# Altium PCB Control_Board_Model_C_Basic_Component_Placement.PcbDoc (part 5 of 8)
Units mil, origin at the board's own origin, x right, y up, seen from the top; angles counter-clockwise.
Board outline 3417.32 x 2110.24 mil, 6 copper layers (1-SIG-TOP, 2-GND, 3-PWR, 4-SIG-HOR, 5-SIG-VERT, 6-GND-BOT), stack 46.063 mil thick; 420 components, 340 nets, 1596 pads, 39 vias.
Unrouted connection lines stored in the file: 362.
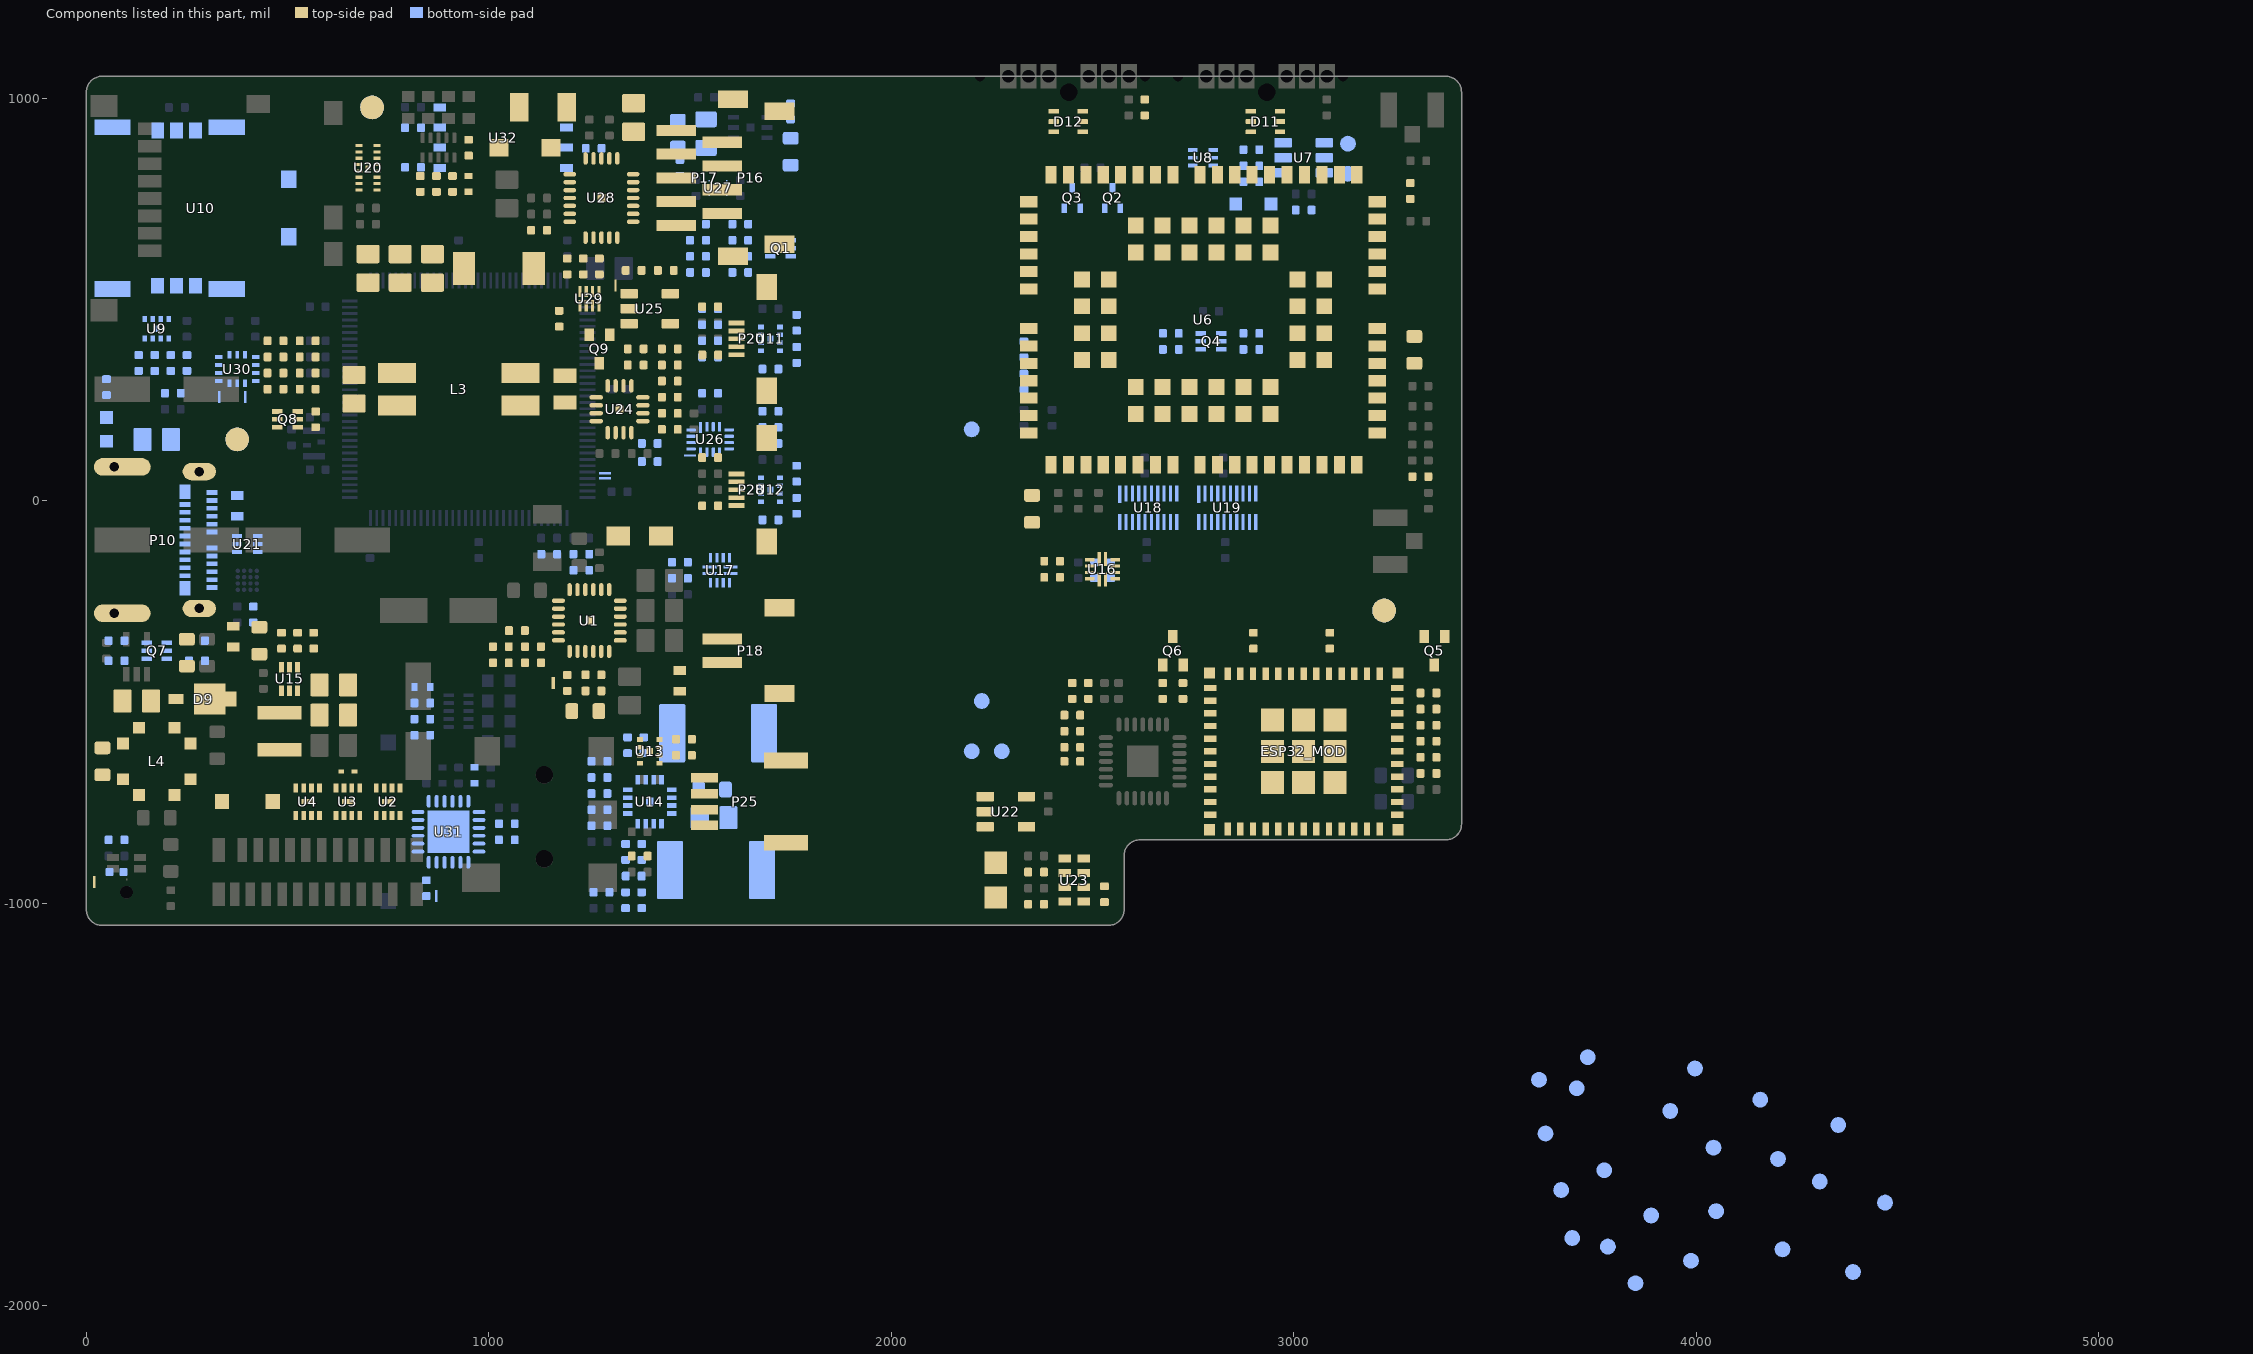
[diagram p7: the components of this part, seen from the top]

## Part data (continued)
L2: "1µH Semi-Shielded Wirewound Inductor 2.4A 54mOhm Max Nonstandard", Inductance="1 uH", Manufacturer="Wurth Elektronik", Manufacturer Part Number=74405031010, Maximum DC Current="2.4 A", Maximum DC Resistance="54 mOhms", Maximum Operating Temperature="+ 125 C", Minimum Operating Temperature="- 40 C", Package / Case="3 mm x 3 mm", Saturation Current="5.4 A", Self Resonant Frequency="66 MHz", Supplier Part Number 1=710-74405031010, Test Frequency="1 MHz", Tolerance="20 %", Application=Power, Brand="Wurth Elektronik", Category="Fixed Inductors", ComponentLink1Description=https://www.mouser.com/datasheet/2/445/74405031010-1720907.pdf, ComponentLink1URL=https://www.mouser.com/datasheet/2/445/74405031010-1720907.pdf, Height="1.2 mm", Length="3 mm", Minimum Order Quantity=1, Mount="Surface Mount", Mounting Style="PCB Mount", Packaging="Cut Tape", Pricing 1="1=0.730, 10=0.721, 50=0.601, 100=0.457, 1000=0.397, 2000=0.385 (USD)", Product="Fixed Inductors", Product Type="Fixed Inductors", Reeling=True, RoHS="RoHS Compliant", RoHS - Mouser=Y, Series=WE-LQSH, Shielding=Shielded, Standard Pack Qty=2000, Stock 1=2000, Subcategory="Inductors, Chokes & Coils", Supplier 1=Mouser, Supplier 2=Digi-Key, Supplier Part Number 2=732-10780-1-ND, Termination=-, Termination Style=SMD/SMT, Width="3 mm"
L3: "2.2µH Shielded Coupled Inductors 3.2A 22mOhm Max 4040 (10.3x10.3 Metric)", Inductance="2.2 uH", Manufacturer=Coilcraft, Manufacturer Part Number=MSD1048H-222, Maximum DC Current="3.2 A", Maximum DC Resistance="22 mOhms", Maximum Operating Temperature="+ 125 C", Minimum Operating Temperature="- 40 C", Self Resonant Frequency="55 MHz", Test Frequency="100 kHz", Tolerance="30 %", Application=Power, Brand=Coilcraft, Category="Fixed Coupled Inductors", ComponentLink1Description=https://www.coilcraft.com/en-us/products/power/coupled-inductors/1-1-shielded-coupled/msd_h/msd1048h/#, ComponentLink1URL=https://www.coilcraft.com/getmedia/492eebb2-11bb-49ba-b07b-44c830c73f93/msd1048h.pdf, Height="4.8 mm", Length="10.3 mm", Minimum Order Quantity=1, Mount="Surface Mount", Mounting Style="PCB Mount", Packaging="Cut Tape", Product="Power Inductors", Product Type="Fixed Coupled Inductors", Reeling=True, Series=MSD1048H, Shielding=Shielded, Subcategory="Inductors, Chokes & Coils", Termination=-, Termination Style=SMD/SMT, Type="SMD Inductor", Width="10.3 mm"
L4: "6.8µH Shielded Coupled Inductors 1.2A 160mOhm Max 1919 (4.8x4.8 Metric)", Inductance="6.8 uH", Manufacturer=Coilcraft, Manufacturer Part Number=LPD5030-682MR, Maximum DC Current="1.2 A", Maximum DC Resistance="160 mOhms", Maximum Operating Temperature="+ 125 C", Minimum Operating Temperature="- 40 C", Self Resonant Frequency="40 MHz", Test Frequency="100 kHz", Tolerance="30 %", Application=Power, Brand=Coilcraft, Category="Fixed Coupled Inductors", ComponentLink1Description=https://www.coilcraft.com/en-us/products/power/coupled-inductors/1-1-shielded-coupled/msd_h/msd1048h/#, ComponentLink1URL=https://www.coilcraft.com/getmedia/492eebb2-11bb-49ba-b07b-44c830c73f93/msd1048h.pdf, Height="2.9 mm", Length="4.8 mm", Minimum Order Quantity=1, Mount="Surface Mount", Mounting Style="PCB Mount", Packaging="Cut Tape", Product="Power Inductors", Product Type="Fixed Coupled Inductors", Reeling=True, Series=LPD5030, Shielding=Shielded, Subcategory="Inductors, Chokes & Coils", Termination=-, Termination Style=SMD/SMT, Type="SMD Inductor", Width="4.8 mm"
P10: library part "CONN 2012670005 RCP USB3.1 TYPEC 24P SMD RA", "USB-C (USB TYPE-C) USB 3.2 Gen 2 (USB 3.1 Gen 2, Superspeed + (USB 3.1)) Receptacle Connector 24 Position Surface Mount, Right Angle; Through Hole", Current Rating=5A, Flammability Rating="UL94 V-0", Insulation Color=Black, Manufacturer=Molex, Manufacturer Part Number=201267-0005, Max Operating Temperature=105°C, Min Operating Temperature=-40°C, Supplier Part Number 1=WM17992CT-ND, Voltage Rating=30V, ComponentLink1Description=https://www.molex.com/pdm_docs/sd/2012670005_sd.pdf?src-supplier=Digi-Key, ComponentLink1URL=https://www.molex.com/pdm_docs/sd/2012670005_sd.pdf?src-supplier=Digi-Key, ComponentLink2Description=http://www.farnell.com/datasheets/2722545.pdf?src-supplier=Element14, ComponentLink2URL=http://www.farnell.com/datasheets/2722545.pdf?src-supplier=Element14, ComponentLink3Description=http://www.farnell.com/datasheets/2722545.pdf?src-supplier=Newark, ComponentLink3URL=http://www.farnell.com/datasheets/2722545.pdf?src-supplier=Newark, ComponentLink4Description=https://www.molex.com/pdm_docs/pk/2012670005-PK1.pdf?src-supplier=Digi-Key, ComponentLink4URL=https://www.molex.com/pdm_docs/pk/2012670005-PK1.pdf?src-supplier=Digi-Key, ComponentLink5Description=http://www.farnell.com/datasheets/2722545.pdf?src-supplier=Farnell, ComponentLink5URL=http://www.farnell.com/datasheets/2722545.pdf?src-supplier=Farnell, Connector Type=USB, Contact Plating=Gold, Gender=Receptacle, Mating Cycles=20000, Mount="Surface Mount,Through Hole", Number of Contacts=24, Number of Ports=1, Packaging="Tape and Reel", Pricing 1="1=2.34, 10=1.997, 100=1.6496 (USD)", Shielding=Shielded, Stock 1=2580, Supplier 1=Digi-Key, Termination=Solder
P16: library part "CONN HEADER SMD R/A 4POS 1.5MM", "Connector Header Surface Mount, Right Angle 4 position 0.059\" (1.50mm)", Color=Natural, Contact Resistance=30mR, Current Rating=1A, Housing Color=Beige, Manufacturer=JST, Manufacturer Part Number=S4B-ZR-SM4A-TF(LF)(SN), Max Operating Temperature=85°C, Max Voltage Rating (AC)=50V, Min Operating Temperature=-25°C, Supplier Part Number 1=455-1695-1-ND, ComponentLink1Description=http://www.jst-mfg.com/product/pdf/eng/eZH.pdf?src-supplier=Digi-Key, ComponentLink1URL=http://www.jst-mfg.com/product/pdf/eng/eZH.pdf?src-supplier=Digi-Key, ComponentLink2Description=http://uk.rs-online.com/webdocs/13ed/0900766b813ed0da.pdf?src-supplier=RSComponents, ComponentLink2URL=http://uk.rs-online.com/webdocs/13ed/0900766b813ed0da.pdf?src-supplier=RSComponents, ComponentLink3Description=https://www.verical.com/server-webapp/html/getDatasheet?partID=646289&src-supplier=Verical, ComponentLink3URL=https://www.verical.com/server-webapp/html/getDatasheet?partID=646289&src-supplier=Verical, ComponentLink4Description=https://www.verical.com/server-webapp/html/getDatasheet?partID=558977&src-supplier=Verical, ComponentLink4URL=https://www.verical.com/server-webapp/html/getDatasheet?partID=558977&src-supplier=Verical, Connector Type="Male Pin", Contact Material=Brass,Tin, Contact Plating=Tin,Copper, Contact Type="Male Pin", Depth=6.5mm, Fastening Type=Detent, Gender=Male, Height=7.2mm, Housing Material=Polyamide, Lead Free="Lead Free", Length=9mm, Max Current Rating=1A, Max Voltage Rating (DC)=50V, Mount="Surface Mount", Number of Contacts=4, Number of Positions=4, Number of Rows=1, Orientation="Right Angle", Packaging="Tape and Reel", pin_1=GND, pin_2=+VDC, pin_3=SENSE, pin_4=CTRL, pin_MP1=MP, pin_MP2=MP, Pitch=1.5mm, Series=ZH, Stock 1=0, Supplier 1=Digi-Key, Termination=Solder, Voltage Rating=50V, Width=3.5mm
P17: library part "CONN HEADER SMD R/A 5POS 1.5MM", "Connector Header Surface Mount, Right Angle 5 position 0.059\" (1.50mm)", Color=Natural, Contact Resistance=30mR, Current Rating=1A, Housing Color=Beige, Manufacturer=JST, Manufacturer Part Number=S5B-ZR-SM4A-TF(LF)(SN), Max Operating Temperature=85°C, Max Voltage Rating (AC)=50V, Min Operating Temperature=-25°C, Supplier Part Number 1=455-1696-1-ND, ComponentLink1Description=http://www.farnell.com/datasheets/2322661.pdf?src-supplier=Element14, ComponentLink1URL=http://www.farnell.com/datasheets/2322661.pdf?src-supplier=Element14, ComponentLink2Description=http://www.jst-mfg.com/product/pdf/eng/eZH.pdf?src-supplier=Digi-Key, ComponentLink2URL=http://www.jst-mfg.com/product/pdf/eng/eZH.pdf?src-supplier=Digi-Key, ComponentLink3Description=https://www.verical.com/server-webapp/html/getDatasheet?partID=640788&src-supplier=Verical, ComponentLink3URL=https://www.verical.com/server-webapp/html/getDatasheet?partID=640788&src-supplier=Verical, ComponentLink4Description=http://www.jst-mfg.com/product/pdf/eng/eZR.pdf?src-supplier=Future+Electronics, ComponentLink4URL=http://www.jst-mfg.com/product/pdf/eng/eZR.pdf?src-supplier=Future+Electronics, Connector Type="Male Pin", Contact Material=Brass,Tin, Contact Plating=Tin,Copper, Contact Type="Male Pin", Depth=6.5mm, Fastening Type=Detent, Gender=Male, Height=7.2mm, Housing Material=Polyamide, Lead Free="Lead Free", Length=10.5mm, Max Current Rating=1A, Mount="Surface Mount", Number of Contacts=5, Number of Positions=5, Number of Rows=1, Orientation="Right Angle", Packaging="Tape and Reel", pin_1=U, pin_2=V, pin_3=W, pin_4=NTC+, pin_5=NTC-, pin_MP1=MP, pin_MP2=MP, Pitch=1.5mm, REACH SVHC=Unknown, Series=ZH, Stock 1=0, Supplier 1=Digi-Key, Termination=Solder, Voltage Rating=50V, Width=3.5mm
P18: library part "CONN HEADER SMD R/A 2POS 1.5MM", "Connector Header Surface Mount, Right Angle 2 position 0.059\" (1.50mm)", Color=Natural, Contact Resistance=30mR, Current Rating=1A, Flammability Rating="UL94 V-0", Housing Color=Beige, Manufacturer=JST, Manufacturer Part Number=S2B-ZR-SM4A-TF(LF)(SN), Max Operating Temperature=85°C, Max Voltage Rating (AC)=50V, Min Operating Temperature=-25°C, Supplier Part Number 1=455-1693-1-ND, ComponentLink1Description=http://www.jst-mfg.com/product/pdf/eng/eZH.pdf?src-supplier=Digi-Key, ComponentLink1URL=http://www.jst-mfg.com/product/pdf/eng/eZH.pdf?src-supplier=Digi-Key, ComponentLink2Description=https://www.verical.com/server-webapp/html/getDatasheet?partID=640459&src-supplier=Verical, ComponentLink2URL=https://www.verical.com/server-webapp/html/getDatasheet?partID=640459&src-supplier=Verical, ComponentLink3Description=https://www.verical.com/server-webapp/html/getDatasheet?partID=411993&src-supplier=Verical, ComponentLink3URL=https://www.verical.com/server-webapp/html/getDatasheet?partID=411993&src-supplier=Verical, Connector Type=Header, Contact Finish - Mating=TIN, Contact Material=Brass,Tin, Contact Plating=Tin,Copper, Contact Shape=Circular, Contact Type="Male Pin", Depth=6.5mm, Fastening Type=Detent, Gender=Male, Height=7.2mm, Housing Material=Polyamide, Insulation Color=Natural, Insulation Material=Nylon, Lead Free="Lead Free", Length=6mm, Max Current Rating=1A, Max Voltage Rating (DC)=50V, Mount="Surface Mount", Number of Contacts=2, Number of Positions=2, Number of Rows=1, Orientation="Right Angle", Packaging="Tape and Reel", pin_1=BATT+, pin_2=BATT-, pin_MP1=MP, pin_MP2=MP, Pitch=1.5mm, Pricing 1="1=0.51, 10=0.481, 100=0.3688, 500=0.3207 (USD)", Series=ZH, Stock 1=136465, Supplier 1=Digi-Key, Termination=Solder, Voltage Rating=50V, Width=3.5mm
P19: "NTC Thermistor 10k 0603 (1608 Metric)", Case/Package=0603, Case Code (Metric)=1608, Manufacturer=Panasonic, Manufacturer Part Number=ERT-J1VG103JA, Max Operating Temperature=125°C, Max Power Dissipation=100mW, Min Operating Temperature=-40°C, Package Quantity=4000, Resistance=10kR, Supplier Part Number 1=P12014CT-ND, Tolerance=5%, Accuracy=1%, Case Code (Imperial)=0603, ComponentLink1Description=http://www.farnell.com/datasheets/2085569.pdf?src-supplier=Farnell, ComponentLink1URL=http://www.farnell.com/datasheets/2085569.pdf?src-supplier=Farnell, ComponentLink2Description=http://www.farnell.com/datasheets/1314428.pdf?src-supplier=Element14, ComponentLink2URL=http://www.farnell.com/datasheets/1314428.pdf?src-supplier=Element14, ComponentLink3Description=https://industrial.panasonic.com/cdbs/www-data/pdf/AUA0000/AUA0000COL16.pdf?src-supplier=Digi-Key, ComponentLink3URL=https://industrial.panasonic.com/cdbs/www-data/pdf/AUA0000/AUA0000COL16.pdf?src-supplier=Digi-Key, ComponentLink4Description=http://industrial.panasonic.com/www-data/pdf/AUA0000/AUA0000CE1.pdf?src-supplier=Future+Electronics, ComponentLink4URL=http://industrial.panasonic.com/www-data/pdf/AUA0000/AUA0000CE1.pdf?src-supplier=Future+Electronics, ComponentLink5Description=https://industrial.panasonic.com/www-data/pdf/AUA0000/AUA0000CE1.pdf?src-supplier=Avnet, ComponentLink5URL=https://industrial.panasonic.com/www-data/pdf/AUA0000/AUA0000CE1.pdf?src-supplier=Avnet, Depth=0.8mm, Lead Free="Lead Free", Length=1.6mm, Mount="Surface Mount", Number of Pins=2, Packaging="Tape and Reel", Pricing 1="1=0.15, 5=0.146, 10=0.13, 25=0.12, 50=0.096, 100=0.0824, 500=0.0721, 1000=0.0618 (USD)", Radiation Hardening=No, REACH SVHC="No SVHC", Stock 1=28072, Supplier 1=Digi-Key, Termination=SMD/SMT, Width=800um
P20 P28: library part "CONN FFC FPC TOP 5POS 0.50MM R/A", "5 Position FFC, FPC Connector Contacts, Top 0.020\" (0.50mm) Surface Mount, Right Angle", Contact Resistance=40mR, Current Rating=500mA, Flammability Rating="UL94 V-0", Manufacturer=Molex, Manufacturer Part Number=0545500571, Max Operating Temperature=85°C, Min Operating Temperature=-20°C, Package Quantity=1, Supplier Part Number 1=WM8824CT-ND, Voltage Rating=50V, Actuator Material=Polyphenylene, ComponentLink1Description=http://www.molex.com/webdocs/datasheets/pdf/en-us/0545500571_FFC_FPC_CONNECTORS.pdf?src-supplier=Avnet, ComponentLink1URL=http://www.molex.com/webdocs/datasheets/pdf/en-us/0545500571_FFC_FPC_CONNECTORS.pdf?src-supplier=Avnet, Contact Material=Bronze, Contact Plating=Gold, Depth=5mm, Housing Material=Polymer, Length=7.7mm, Mount="Surface Mount", Number of Positions=5, Number of Rows=1, Orientation="Right Angle", Packaging="Tape and Reel", pin_1=SCL, pin_2=SDA, pin_3=VDD, pin_4=GPIO, pin_5=GND, pin_MP1=MP, pin_MP2=MP, Pitch=0.02inch, Pricing 1="1=0.98, 10=0.808, 100=0.673, 1000=0.5384 (USD)", Radiation Hardening=No, Stock 1=20865, Supplier 1=Digi-Key, Termination=Solder, Wire/Cable Type=Straight
P25: library part "CONN HEADER SMD R/A 4POS 1MM", "Connector Header Surface Mount, Right Angle 4 position 0.039\" (1.00mm)", Color=Natural, Manufacturer=JST, Manufacturer Part Number=SM04B-NSHSS-TB(LF)(SN), Supplier Part Number 1=455-2774-1-ND, Connector Type="Outer Shroud Contact", Contact Plating=Tin, Contact Type="Outer Shroud Contact", Fastening Type=Latch, Mount="Surface Mount", Number of Positions=4, Number of Rows=1, Packaging="Tape and Reel", pin_1=B+, pin_2=B-, pin_3=A-, pin_4=A+, pin_MP1=MP, pin_MP2=MP, Pitch=0.039inch, Pricing 1="1=0.79, 10=0.694, 100=0.5985, 500=0.4897 (USD)", Series=NSH, Stock 1=27326, Supplier 1=Digi-Key, Termination=Solder
Q1 Q4 Q7: library part "ARRAY MOSFET 2N-CH 30V 0.4A SOT-563", "Mosfet Array 2 N-Channel (Dual) 30V 400mA 400mW Surface Mount SOT-563", Case/Package=SOT-563, Continuous Drain Current (ID)=400mA, Drain to Source Breakdown Voltage=30V, Drain to Source Resistance=1.2R, Gate to Source Voltage (Vgs)=10V, Input Capacitance=39pF, Manufacturer=Diodes, Max Operating Temperature=150°C, Max Power Dissipation=400mW, Min Operating Temperature=-55°C, Package Quantity=3000, Supplier Part Number 1=DMN32D2LV-7DICT-ND, ComponentLink1Description=https://www.diodes.com/assets/Datasheets/ds31121.pdf?src-supplier=Digi-Key, ComponentLink1URL=https://www.diodes.com/assets/Datasheets/ds31121.pdf?src-supplier=Digi-Key, ComponentLink2Description=http://www.mouser.com/ds/2/115/ds31121-89496.pdf?src-supplier=Mouser, ComponentLink2URL=http://www.mouser.com/ds/2/115/ds31121-89496.pdf?src-supplier=Mouser, ComponentLink3Description=http://www.diodes.com///datasheets/ds31121.pdf?src-supplier=Avnet, ComponentLink3URL=http://www.diodes.com///datasheets/ds31121.pdf?src-supplier=Avnet, Drain to Source Voltage (Vdss)=30V, Element Configuration=Dual, FET Type="2 N-Channel", Height=0.6mm, Length=1.6mm, Manufacturer Part Number=DMN32D2LV-7, Mount="Surface Mount", Number of Channels=2, Packaging="Tape and Reel", Polarity=N-CHANNEL, Pricing 1="1=0.39, 10=0.338, 25=0.3152, 100=0.234, 500=0.1827, 1000=0.1485 (USD)", Radiation Hardening=No, Rds On Max=1.2R, REACH SVHC="No SVHC", Series=-, Stock 1=141366, Supplier 1=Digi-Key, Weight=0.000106oz, Width=1.2mm
  Q4: ClassName=P109
  Q7: ClassName=TCPP
Q2 Q3: library part "TRANS PREBIAS NPN 200MW SC75", "Pre-Biased Bipolar Transistor (BJT) NPN - Pre-Biased 50V 100mA  200mW Surface Mount SC-75, SOT-416", Case/Package=SC, Collector Emitter Breakdown Voltage=50V, Collector Emitter Saturation Voltage=250mV, Continuous Collector Current=100mA, Emitter Base Voltage (VEBO)=6V, Manufacturer="ON Semiconductor", Max Operating Temperature=150°C, Max Power Dissipation=200mW, Min Operating Temperature=-55°C, Package Quantity=1, Supplier Part Number 1=DTC143ZET1GOSCT-ND, ClassName=P109, Collector Emitter Voltage (VCEO)=50V, ComponentLink1Description=http://www.onsemi.com/pub/Collateral/DTC143Z-D.PDF?src-supplier=Digi-Key, ComponentLink1URL=http://www.onsemi.com/pub/Collateral/DTC143Z-D.PDF?src-supplier=Digi-Key, ComponentLink2Description=http://www.onsemi.com/pub_link/Collateral/DTC124E-D.PDF?src-supplier=Avnet+Europe, ComponentLink2URL=http://www.onsemi.com/pub_link/Collateral/DTC124E-D.PDF?src-supplier=Avnet+Europe, ComponentLink3Description=https://www.verical.com/server-webapp/html/getDatasheet?partID=60141&src-supplier=Verical, ComponentLink3URL=https://www.verical.com/server-webapp/html/getDatasheet?partID=60141&src-supplier=Verical, Contact Plating=Tin,Matte, Current Rating=100mA, Element Configuration=Single, Halogen Free="Halogen Free", Height=0.8mm, hFE Min=80, Lead Free="Lead Free", Length=1.65mm, Manufacturer Part Number=DTC143ZET1G, Max Breakdown Voltage=50V, Max Collector Current=100mA, Max Output Current=100mA, Mount="Surface Mount", Number of Pins=3, Operating Supply Voltage=50V, Packaging="Tape and Reel", Polarity=NPN, Power Dissipation=200mW, Pricing 1="1=0.14, 10=0.129, 25=0.1224, 100=0.0539, 500=0.0423, 1000=0.0294 (USD)", Radiation Hardening=No, REACH SVHC="No SVHC", Stock 1=44167, Supplier 1=Digi-Key, Voltage Rating (DC)=50V, Width=0.9mm
Q5 Q6 Q9: library part "TRANS BC847CW,115 NPN 45V 0.1A SOT323", "Bipolar (BJT) Transistor NPN 45V 100mA 100MHz 200mW Surface Mount SOT-323-3", Manufacturer=Nexperia, Supplier Part Number 1=1727-4312-1-ND, ComponentLink1Description=http://www.farnell.com/datasheets/1856333.pdf?src-supplier=Farnell, ComponentLink1URL=http://www.farnell.com/datasheets/1856333.pdf?src-supplier=Farnell, ComponentLink2Description=http://www.farnell.com/datasheets/1856333.pdf?src-supplier=Element14, ComponentLink2URL=http://www.farnell.com/datasheets/1856333.pdf?src-supplier=Element14, ComponentLink3Description=https://assets.nexperia.com/documents/data-sheet/BC847_SER.pdf?src-supplier=Digi-Key, ComponentLink3URL=https://assets.nexperia.com/documents/data-sheet/BC847_SER.pdf?src-supplier=Digi-Key, ComponentLink4Description=http://www.farnell.com/datasheets/1856333.pdf?src-supplier=Newark, ComponentLink4URL=http://www.farnell.com/datasheets/1856333.pdf?src-supplier=Newark, Manufacturer Part Number=BC847CW,115, Mount="Surface Mount", Pricing 1="1=0.13, 10=0.118, 25=0.1124, 100=0.0495, 250=0.0475, 500=0.0389, 1000=0.027 (USD)", Stock 1=327256, Supplier 1=Digi-Key
  Q5 Q6: ClassName=U_ESP32-WROOM32D_Module
Q8: library part "ARRAY MOSFET N/P-CH 20V 0.2A EMT6", "Mosfet Array N and P-Channel 20V 200mA 150mW Surface Mount EMT6", Case/Package=SOT-23-5, Continuous Drain Current (ID)=200mA, Drain to Source Resistance=1R, Drain to Source Voltage (Vdss)=20V, Input Capacitance=25pF, Manufacturer=Rohm, Max Operating Temperature=150°C, Max Power Dissipation=150mW, Min Operating Temperature=-55°C, Package Quantity=1, Supplier Part Number 1=EM6M2T2RCT-ND, ClassName=STM32G473CETx, ComponentLink1Description=http://rohmfs.rohm.com/en/techdata_basic/transistor/taping/EMT6_T2R_taping.pdf?src-supplier=Digi-Key, ComponentLink1URL=http://rohmfs.rohm.com/en/techdata_basic/transistor/taping/EMT6_T2R_taping.pdf?src-supplier=Digi-Key, FET Type="N and P-Channel", Lead Free="Lead Free", Manufacturer Part Number=EM6M2T2R, Mount="Surface Mount", Number of Pins=6, Packaging="Tape and Reel", Pricing 1="1=0.44, 10=0.375, 25=0.35, 100=0.26, 250=0.247, 500=0.203, 1000=0.165, 2500=0.155 (USD)", Radiation Hardening=No, Rds On Max=1R, Stock 1=84378, Supplier 1=Digi-Key
R1: library part "RES SMD 1K OHM 1% 1/16W 0402", "1 kOhms ±1% 0.063W, 1/16W Chip Resistor 0402 (1005 Metric) Moisture Resistant Thick Film", Case/Package=0402, Case Code (Metric)=1005, Manufacturer=Yageo, Max Operating Temperature=155°C, Min Operating Temperature=-55°C, Power Rating=62.5mW, Resistance=1kR, Supplier Part Number 1=311-1.00KLRCT-ND, Temperature Coefficient=100ppm/°C, Tolerance=1%, Voltage Rating=50V, Case Code (Imperial)=0402, ComponentLink1Description=http://www.mouser.com/ds/2/447/PYu-RC0402_51_RoHS_L_6_r-8721.pdf?src-supplier=Mouser, ComponentLink1URL=http://www.mouser.com/ds/2/447/PYu-RC0402_51_RoHS_L_6_r-8721.pdf?src-supplier=Mouser, ComponentLink2Description=http://documents.rs-components.com/techlib://itc_doclist_GB.htm?stockno=6186122&src-supplier=RSComponents, ComponentLink2URL=http://documents.rs-components.com/techlib://itc_doclist_GB.htm?stockno=6186122&src-supplier=RSComponents, ComponentLink3Description=http://www.farnell.com/datasheets/1018594.pdf?src-supplier=Element14, ComponentLink3URL=http://www.farnell.com/datasheets/1018594.pdf?src-supplier=Element14, ComponentLink4Description=http://www.yageo.com/documents/recent/PYu-RC0402_51_RoHS_L_6_r.pdf?src-supplier=Future+Electronics, ComponentLink4URL=http://www.yageo.com/documents/recent/PYu-RC0402_51_RoHS_L_6_r.pdf?src-supplier=Future+Electronics, ComponentLink5Description=http://www.farnell.com/datasheets/2167052.pdf?src-supplier=Element14, ComponentLink5URL=http://www.farnell.com/datasheets/2167052.pdf?src-supplier=Element14, Composition="Thick Film", Depth=0.5mm, Height=0.32mm, Lead Free="Lead Free", Length=1mm, Manufacturer Part Number=RC0402FR-071KL, Military Standard=Not, Number of Pins=2, Packaging="Tape and Reel", Pricing 1="1=0.1, 10=0.015, 100=0.0062, 1000=0.0028, 2500=0.0024, 5000=0.002 (USD)", REACH SVHC=Unknown, Stock 1=9574509, Supplier 1=Digi-Key, Termination=SMD/SMT, Voltage Rating (DC)=50V, Width=0.5mm
R2 R24 R25 R29 R30 R33 R34 R38 R47 R49 R52 R53 R68 R71 R72 R73 R74 R83 R86 R87 R88 R97 R99 R103 R118 R119 R120 R121 R123: "10 kOhms ±1% 0.063W, 1/16W Chip Resistor 0402 (1005 Metric) Moisture Resistant Thick Film", Case/Package=0402, Case Code (Metric)=1005, Manufacturer=Yageo, Manufacturer Part Number=RC0402FR-0710KP, Max Operating Temperature=155°C, Max Power Dissipation=63mW, Min Operating Temperature=-55°C, Resistance=10kR, Supplier Part Number 1=YAG1249CT-ND, Temperature Coefficient=150ppm/°C, Tolerance=1%, Case Code (Imperial)=0402, ComponentLink1Description=http://www.yageo.com/NewPortal/yageodocoutput?fileName=/pdf/R-Chip/PYu-RC_51_RoHS_P_0.pdf&src-supplier=Digi-Key, ComponentLink1URL=http://www.yageo.com/NewPortal/yageodocoutput?fileName=/pdf/R-Chip/PYu-RC_51_RoHS_P_0.pdf&src-supplier=Digi-Key, Composition="Thick Film", Features="Moisture Resistant", Height=0.016inch, Length=0.039inch, Mount="Surface Mount", Number of Terminations=2, Packaging="Tape and Reel", Pricing 1="1=0.1, 10=0.035, 100=0.014, 1000=0.0063, 2500=0.0055, 5000=0.0045 (USD)", Stock 1=839368, Supplier 1=Digi-Key, Width=0.02inch
  R33 R34: ClassName=UART_MUX
  R47 R49: ClassName=P109
  R52 R53: ClassName=U_ESP32-WROOM32D_Module
  R87 R88: ClassName=USB_MUX
R3: "31.6 kOhms ±1% 0.063W, 1/16W Chip Resistor 0402 (1005 Metric) Moisture Resistant Thick Film", Case/Package=0402, Case Code (Metric)=1005, Manufacturer=Yageo, Manufacturer Part Number=RC0402FR-0731K6L, Max Operating Temperature=155°C, Max Power Dissipation=63mW, Min Operating Temperature=-55°C, Package Quantity=10000, Power Rating=62.5mW, Resistance=31.6kOhm, Supplier Part Number 1=YAG3115CT-ND, Temperature Coefficient=100ppm/°C, Tolerance=1%, Voltage Rating=50V, Case Code (Imperial)=0402, ComponentLink1Description=http://www.yageo.com/documents/recent/PYu-RC0402_51_RoHS_L_6_r.pdf?src-supplier=Future+Electronics, ComponentLink1URL=http://www.yageo.com/documents/recent/PYu-RC0402_51_RoHS_L_6_r.pdf?src-supplier=Future+Electronics, ComponentLink2Description=http://www.yageo.com/documents/recent/PYu-RC0402_51_RoHS_L_6_r.pdf?src-supplier=Mouser, ComponentLink2URL=http://www.yageo.com/documents/recent/PYu-RC0402_51_RoHS_L_6_r.pdf?src-supplier=Mouser, Composition="Thick Film", Depth=0.5mm, Features="Moisture Resistant", Height=0.016inch, Lead Free="Lead Free", Length=1mm, Military Standard=Not, Mount="Surface Mount", Number of Terminations=2, Packaging="Tape and Reel", Pricing 1="1=0.1, 10=0.016, 100=0.0064, 1000=0.0029, 2500=0.0025, 5000=0.0021 (USD)", Stock 1=2889310, Supplier 1=Digi-Key, Termination=SMD/SMT, Voltage Rating (DC)=50V, Weight=10.729601oz, Width=0.02inch
R4: "5.36 kOhms ±1% 0.063W, 1/16W Chip Resistor 0402 (1005 Metric) Moisture Resistant Thick Film", Case/Package=0402, Case Code (Metric)=1005, Manufacturer=Yageo, Manufacturer Part Number=RC0402FR-075K36L, Max Operating Temperature=155°C, Max Power Dissipation=63mW, Min Operating Temperature=-55°C, Package Quantity=1, Power Rating=62.5mW, Resistance=5.36kR, Supplier Part Number 1=311-5.36KLRCT-ND, Temperature Coefficient=100ppm/°C, Tolerance=1%, Voltage Rating=50V, Case Code (Imperial)=0402, ComponentLink1Description=https://www.verical.com/server-webapp/html/getDatasheet?partID=314179&src-supplier=Verical, ComponentLink1URL=https://www.verical.com/server-webapp/html/getDatasheet?partID=314179&src-supplier=Verical, ComponentLink2Description=http://www.yageo.com/pdf/PYu-RC0402_51_RoHS_L_4.pdf?src-supplier=Avnet, ComponentLink2URL=http://www.yageo.com/pdf/PYu-RC0402_51_RoHS_L_4.pdf?src-supplier=Avnet, ComponentLink3Description=http://www.yageo.com/documents/recent/PYu-RC_Group_51_RoHS_L_10.pdf?src-supplier=Digi-Key, ComponentLink3URL=http://www.yageo.com/documents/recent/PYu-RC_Group_51_RoHS_L_10.pdf?src-supplier=Digi-Key, ComponentLink4Description=http://www.yageo.com/documents/recent/PYu-RC0402_51_RoHS_L_6_r.pdf?src-supplier=Mouser, ComponentLink4URL=http://www.yageo.com/documents/recent/PYu-RC0402_51_RoHS_L_6_r.pdf?src-supplier=Mouser, ComponentLink5Description=http://www.yageo.com/documents/recent/PYu-RC0402_51_RoHS_L_6.pdf?src-supplier=Avnet+Europe, ComponentLink5URL=http://www.yageo.com/documents/recent/PYu-RC0402_51_RoHS_L_6.pdf?src-supplier=Avnet+Europe, Composition="Thick Film", Contact Plating=Tin,Lead,Matte, Depth=0.5mm, Features="Moisture Resistant", Height=0.016inch, Lead Free="Lead Free", Length=1mm, Military Standard=Not, Mount="Surface Mount", Number of Terminations=2, Packaging="Tape and Reel", Pricing 1="1=0.1, 10=0.016, 100=0.0064, 1000=0.0029, 2500=0.0025, 5000=0.0021 (USD)", Radiation Hardening=No, Stock 1=170749, Supplier 1=Digi-Key, Termination=SMD/SMT, Voltage Rating (DC)=50V, Width=0.02inch
R5 R6 R7 R8 R109: "4.75 kOhms ±1% 0.063W, 1/16W Chip Resistor 0402 (1005 Metric) Moisture Resistant Thick Film", Case/Package=0402, Case Code (Metric)=1005, Manufacturer=Yageo, Manufacturer Part Number=RC0402FR-074K75P, Max Operating Temperature=155°C, Max Power Dissipation=63mW, Min Operating Temperature=-55°C, Resistance=4.75kR, Supplier Part Number 1=YAG1271CT-ND, Temperature Coefficient=150ppm/°C, Tolerance=1%, Case Code (Imperial)=0402, ComponentLink1Description=http://www.yageo.com/NewPortal/yageodocoutput?fileName=/pdf/R-Chip/PYu-RC_51_RoHS_P_0.pdf&src-supplier=Digi-Key, ComponentLink1URL=http://www.yageo.com/NewPortal/yageodocoutput?fileName=/pdf/R-Chip/PYu-RC_51_RoHS_P_0.pdf&src-supplier=Digi-Key, ComponentLink2Description=http://www.yageo.com.tw/exep/pages/download/literatures/PYu-R_INT-thick_7.pdf?src-supplier=Digi-Key, ComponentLink2URL=http://www.yageo.com.tw/exep/pages/download/literatures/PYu-R_INT-thick_7.pdf?src-supplier=Digi-Key, Composition="Thick Film", Features="Moisture Resistant", Height=0.016inch, Length=0.039inch, Mount="Surface Mount", Number of Terminations=2, Packaging="Tape and Reel", Pricing 1="1=0.1, 10=0.035, 100=0.014, 1000=0.0063, 2500=0.0055, 5000=0.0045 (USD)", Stock 1=23485, Supplier 1=Digi-Key, Width=0.02inch
  R5 R6 R7 R8: ClassName=I2C_SW
R9 R10 R104: "2.7 kOhms ±1% 0.063W, 1/16W Chip Resistor 0402 (1005 Metric) Moisture Resistant Thick Film", Case/Package=0402, Case Code (Metric)=1005, Manufacturer=Yageo, Manufacturer Part Number=RC0402FR-072K7L, Max Operating Temperature=155°C, Max Power Dissipation=63mW, Min Operating Temperature=-55°C, Package Quantity=1, Resistance=2.7kR, Supplier Part Number 1=311-2.70KLRCT-ND, Temperature Coefficient=100ppm/°C, Tolerance=1%, Voltage Rating=50V, Case Code (Imperial)=0402, ComponentLink1Description=http://www.mouser.com/ds/2/447/PYu-RC0402_51_RoHS_L_6_r-8721.pdf?src-supplier=Mouser, ComponentLink1URL=http://www.mouser.com/ds/2/447/PYu-RC0402_51_RoHS_L_6_r-8721.pdf?src-supplier=Mouser, ComponentLink2Description=http://www.yageo.com/documents/recent/PYu-RC_Group_51_RoHS_L_9.pdf?src-supplier=Digi-Key, ComponentLink2URL=http://www.yageo.com/documents/recent/PYu-RC_Group_51_RoHS_L_9.pdf?src-supplier=Digi-Key, ComponentLink3Description=http://www.yageo.com/documents/recent/PYu-RC_Group_51_RoHS_L_10.pdf?src-supplier=Digi-Key, ComponentLink3URL=http://www.yageo.com/documents/recent/PYu-RC_Group_51_RoHS_L_10.pdf?src-supplier=Digi-Key, ComponentLink4Description=http://www.farnell.com/datasheets/2167052.pdf?src-supplier=Element14, ComponentLink4URL=http://www.farnell.com/datasheets/2167052.pdf?src-supplier=Element14, Composition="Thick Film", Depth=0.5mm, Features="Moisture Resistant", Height=0.016inch, Lead Free="Lead Free", Length=1mm, Military Standard=Not, Mount="Surface Mount", Number of Terminations=2, Packaging="Tape and Reel", Power Rating=63mW, Pricing 1="1=0.1, 10=0.016, 100=0.0064, 1000=0.0029, 2500=0.0025, 5000=0.0021 (USD)", REACH SVHC=Unknown, Stock 1=261850, Supplier 1=Digi-Key, Termination=SMD/SMT, Width=0.02inch, Working Voltage=50V
  R9 R10: ClassName=STM32G473CETx
R11 R12 R13 R14 R15 R16 R17 R18 R19 R20 R21 R46 R48 R50 R54 R55 R56 R57 R77 R78 R80 R81 R91 R94 R115 R116: "100 kOhms ±1% 0.063W, 1/16W Chip Resistor 0402 (1005 Metric) Moisture Resistant Thick Film", Case/Package=0402, Case Code (Metric)=1005, Manufacturer=Yageo, Manufacturer Part Number=RC0402FR-07100KL, Max Operating Temperature=155°C, Max Power Dissipation=63mW, Min Operating Temperature=-55°C, Package Quantity=1, Resistance="100 kOhm", Supplier Part Number 1=311-100KLRDKR-ND, Temperature Coefficient=100ppm/°C, Tolerance=1%, Voltage Rating=50V, Case Code (Imperial)=0402, ComponentLink1Description=http://www.yageo.com/documents/recent/PYu-RC_Group_51_RoHS_L_10.pdf?src-supplier=Digi-Key, ComponentLink1URL=http://www.yageo.com/documents/recent/PYu-RC_Group_51_RoHS_L_10.pdf?src-supplier=Digi-Key, ComponentLink2Description=http://www.farnell.com/datasheets/1018594.pdf?src-supplier=Element14, ComponentLink2URL=http://www.farnell.com/datasheets/1018594.pdf?src-supplier=Element14, ComponentLink3Description=http://www.yageo.com/documents/recent/PYu-RC_Group_51_RoHS_L_9.pdf?src-supplier=Verical, ComponentLink3URL=http://www.yageo.com/documents/recent/PYu-RC_Group_51_RoHS_L_9.pdf?src-supplier=Verical, ComponentLink4Description=http://www.yageo.com/documents/recent/PYu-RC_Group_51_RoHS_L_9.pdf?src-supplier=Mouser, ComponentLink4URL=http://www.yageo.com/documents/recent/PYu-RC_Group_51_RoHS_L_9.pdf?src-supplier=Mouser, ComponentLink5Description=http://documents.rs-components.com/techlib://itc_doclist_GB.htm?stockno=6185797&src-supplier=RSComponents, ComponentLink5URL=http://documents.rs-components.com/techlib://itc_doclist_GB.htm?stockno=6185797&src-supplier=RSComponents, Composition="Thick Film", Depth=0.5mm, Features="Moisture Resistant", Height=0.016inch, Lead Free="Lead Free", Length=0.039inch, Military Standard=Not, Number of Terminations=2, Packaging="Tape and Reel", Power Rating=63mW, Pricing 1="1=0.1, 10=0.016, 100=0.0064, 1000=0.0029, 2500=0.0025, 5000=0.0021 (USD)", REACH SVHC="No SVHC", Stock 1=47448883, Supplier 1=Digi-Key, Termination=SMD/SMT, Width=0.02inch, Working Voltage=50V
  R11 R12 R13 R14 R15 R16 R17 R18 R19 R20 R21 R46 R54 R55 R56 R57 R77 R78: Mount="Surface Mount"
  R48 R50: ClassName=P109, Mount="Surface Mount"
  R80 R81: ClassName=TCPP, Mount="Surface Mount"
  R91 R94: ClassName=STM32G473CETx, Mount="Surface Mount"
R22 R23 R26 R27 R35 R40 R41 R42 R43 R44 R51 R58 R59 R60 R84 R111 R112: "0 Ohms Jumper 0.063W, 1/16W Chip Resistor 0402 (1005 Metric) Moisture Resistant Thick Film", Case/Package=0402, Case Code (Metric)=1005, Manufacturer=Yageo, Manufacturer Part Number=RC0402JR-070RL, Max Operating Temperature=155°C, Max Power Dissipation=63mW, Min Operating Temperature=-55°C, Package Quantity=1, Power Rating=62.5mW, Resistance="0 Ohm", Supplier Part Number 1=311-0.0JRCT-ND, Temperature Coefficient=200ppm/°C, Tolerance=5%, Voltage Rating=50V, Case Code (Imperial)=0402, ComponentLink1Description=http://www.yageo.com/documents/recent/PYu-RC_Group_51_RoHS_L_10.pdf?src-supplier=Digi-Key, ComponentLink1URL=http://www.yageo.com/documents/recent/PYu-RC_Group_51_RoHS_L_10.pdf?src-supplier=Digi-Key, ComponentLink2Description=http://www.yageo.com/documents/recent/PYu-RC0402_51_RoHS_L_6.pdf?src-supplier=Avnet+Europe, ComponentLink2URL=http://www.yageo.com/documents/recent/PYu-RC0402_51_RoHS_L_6.pdf?src-supplier=Avnet+Europe, ComponentLink3Description=http://www.farnell.com/datasheets/1018594.pdf?src-supplier=Element14, ComponentLink3URL=http://www.farnell.com/datasheets/1018594.pdf?src-supplier=Element14, ComponentLink4Description=https://www.verical.com/server-webapp/html/getDatasheet?partID=326379&src-supplier=Verical, ComponentLink4URL=https://www.verical.com/server-webapp/html/getDatasheet?partID=326379&src-supplier=Verical, ComponentLink5Description=http://www.farnell.com/datasheets/2167052.pdf?src-supplier=Element14, ComponentLink5URL=http://www.farnell.com/datasheets/2167052.pdf?src-supplier=Element14, Composition="Thick Film", Contact Plating=Tin,Matte, Depth=0.5mm, Features="Moisture Resistant", Height=0.016inch, Lead Free="Lead Free", Length=1mm, Military Standard=Not, Mount="Surface Mount", Number of Terminations=2, Packaging="Tape and Reel", Pricing 1="1=0.1, 10=0.013, 25=0.0092, 50=0.0072, 100=0.0053, 250=0.004, 500=0.0032, 1000=0.0024, 5000=0.0017 (USD)", Radiation Hardening=No, REACH SVHC=Unknown, Stock 1=46057148, Supplier 1=Digi-Key, Termination=SMD/SMT, Width=0.02inch
  R22 R23: ClassName=STM32G473CETx
  R43 R44: ClassName=P109
  R51: ClassName=U_ESP32-WROOM32D_Module
  R111: ClassName=+3V3_PS
  R112: ClassName=+1V8_PS
R28 R31 R36 R37 R61 R62 R63 R82 R85 R102: library part "RES SMD NO BOM 0402", "Placeholder for a 0402 resistor", Case/Package=0402
R32 R69 R130: "1 kOhms ±1% 0.063W, 1/16W Chip Resistor 0402 (1005 Metric) Moisture Resistant Thick Film", Case/Package=0402, Case Code (Metric)=1005, Manufacturer=Yageo, Manufacturer Part Number=RC0402FR-071KL, Max Operating Temperature=155°C, Min Operating Temperature=-55°C, Power Rating=62.5mW, Resistance=1kR, Supplier Part Number 1=311-1.00KLRCT-ND, Temperature Coefficient=100ppm/°C, Tolerance=1%, Voltage Rating=50V, Case Code (Imperial)=0402, ComponentLink1Description=http://www.mouser.com/ds/2/447/PYu-RC0402_51_RoHS_L_6_r-8721.pdf?src-supplier=Mouser, ComponentLink1URL=http://www.mouser.com/ds/2/447/PYu-RC0402_51_RoHS_L_6_r-8721.pdf?src-supplier=Mouser, ComponentLink2Description=http://documents.rs-components.com/techlib://itc_doclist_GB.htm?stockno=6186122&src-supplier=RSComponents, ComponentLink2URL=http://documents.rs-components.com/techlib://itc_doclist_GB.htm?stockno=6186122&src-supplier=RSComponents, ComponentLink3Description=http://www.farnell.com/datasheets/1018594.pdf?src-supplier=Element14, ComponentLink3URL=http://www.farnell.com/datasheets/1018594.pdf?src-supplier=Element14, ComponentLink4Description=http://www.yageo.com/documents/recent/PYu-RC0402_51_RoHS_L_6_r.pdf?src-supplier=Future+Electronics, ComponentLink4URL=http://www.yageo.com/documents/recent/PYu-RC0402_51_RoHS_L_6_r.pdf?src-supplier=Future+Electronics, ComponentLink5Description=http://www.farnell.com/datasheets/2167052.pdf?src-supplier=Element14, ComponentLink5URL=http://www.farnell.com/datasheets/2167052.pdf?src-supplier=Element14, Composition="Thick Film", Depth=0.5mm, Height=0.32mm, Lead Free="Lead Free", Length=1mm, Military Standard=Not, Number of Pins=2, Packaging="Tape and Reel", Pricing 1="1=0.1, 10=0.015, 100=0.0062, 1000=0.0028, 2500=0.0024, 5000=0.002 (USD)", REACH SVHC=Unknown, Stock 1=9574509, Supplier 1=Digi-Key, Termination=SMD/SMT, Voltage Rating (DC)=50V, Width=0.5mm
  R32 R69: Mount="Surface Mount"
R39: "15 kOhms ±1% 0.063W, 1/16W Chip Resistor 0402 (1005 Metric)  Thick Film", Case/Package=0402, Case Code (Metric)=1005, Manufacturer=Yageo, Manufacturer Part Number=RC0402FR-0715KL, Max Operating Temperature=155°C, Max Power Dissipation=63mW, Min Operating Temperature=-55°C, Package Quantity=1, Power Rating=62.5mW, Resistance=15kR, Resistor Type="Thick Film", Supplier Part Number 1=311-15.0KLRCT-ND, Temperature Coefficient=100ppm/°C, Tolerance=1%, Voltage Rating=50V, Case Code (Imperial)=0402, ComponentLink1Description=http://www.farnell.com/datasheets/2167052.pdf?src-supplier=Element14, ComponentLink1URL=http://www.farnell.com/datasheets/2167052.pdf?src-supplier=Element14, ComponentLink2Description=http://www.mouser.com/ds/2/447/PYu-RC0402_51_RoHS_L_6_r-8721.pdf?src-supplier=Mouser, ComponentLink2URL=http://www.mouser.com/ds/2/447/PYu-RC0402_51_RoHS_L_6_r-8721.pdf?src-supplier=Mouser, ComponentLink3Description=http://www.yageo.com/documents/recent/PYu-RC_Group_51_RoHS_L_10.pdf?src-supplier=Digi-Key, ComponentLink3URL=http://www.yageo.com/documents/recent/PYu-RC_Group_51_RoHS_L_10.pdf?src-supplier=Digi-Key, ComponentLink4Description=http://www.yageo.com/documents/recent/PYu-RC0402_51_RoHS_L_6_r.pdf?src-supplier=Future+Electronics, ComponentLink4URL=http://www.yageo.com/documents/recent/PYu-RC0402_51_RoHS_L_6_r.pdf?src-supplier=Future+Electronics, Depth=0.5mm, Features="Moisture Resistant", Height=0.016inch, Lead Free="Lead Free", Length=1mm, Military Standard=Not, Mount="Surface Mount", Number of Pins=2, Number of Terminations=2, Packaging="Tape and Reel", Pricing 1="1=0.1, 10=0.014, 100=0.0058, 1000=0.0026, 2500=0.0023, 5000=0.0019 (USD)", REACH SVHC="No SVHC", Stock 1=5005874, Supplier 1=Digi-Key, Termination=SMD/SMT, Voltage Rating (DC)=50V, Weight=2.3E-05oz, Width=0.5mm
R45: "5.1 kOhms ±1% 0.063W, 1/16W Chip Resistor 0402 (1005 Metric) Moisture Resistant Thick Film", Case/Package=0402, Case Code (Metric)=1005, Manufacturer=Yageo, Manufacturer Part Number=RC0402FR-075K1L, Max Operating Temperature=155°C, Max Power Dissipation=63mW, Min Operating Temperature=-55°C, Package Quantity=1, Resistance=5.1kR, Supplier Part Number 1=311-5.10KLRCT-ND, Temperature Coefficient=100ppm/°C, Tolerance=1%, Voltage Rating=50V, Case Code (Imperial)=0402, ComponentLink1Description=https://www.verical.com/server-webapp/html/getDatasheet?partID=323636&src-supplier=Verical, ComponentLink1URL=https://www.verical.com/server-webapp/html/getDatasheet?partID=323636&src-supplier=Verical, ComponentLink2Description=http://www.yageo.com/documents/recent/PYu-RC_Group_51_RoHS_L_10.pdf?src-supplier=Digi-Key, ComponentLink2URL=http://www.yageo.com/documents/recent/PYu-RC_Group_51_RoHS_L_10.pdf?src-supplier=Digi-Key, ComponentLink3Description=http://www.farnell.com/datasheets/2167052.pdf?src-supplier=Element14, ComponentLink3URL=http://www.farnell.com/datasheets/2167052.pdf?src-supplier=Element14, ComponentLink4Description=http://www.yageo.com/documents/recent/PYu-RC0402_51_RoHS_L_6_r.pdf?src-supplier=Future+Electronics, ComponentLink4URL=http://www.yageo.com/documents/recent/PYu-RC0402_51_RoHS_L_6_r.pdf?src-supplier=Future+Electronics, ComponentLink5Description=http://www.yageo.com/documents/recent/PYu-RC0402_51_RoHS_L_6_r.pdf?src-supplier=Mouser, ComponentLink5URL=http://www.yageo.com/documents/recent/PYu-RC0402_51_RoHS_L_6_r.pdf?src-supplier=Mouser, ComponentLink6Description=http://www.farnell.com/datasheets/1018594.pdf?src-supplier=Element14, ComponentLink6URL=http://www.farnell.com/datasheets/1018594.pdf?src-supplier=Element14, Composition="Thick Film", Depth=0.5mm, Features="Moisture Resistant", Height=0.016inch, Lead Free="Lead Free", Length=1mm, Military Standard=Not, Mount="Surface Mount", Number of Terminations=2, Packaging="Tape and Reel", Power Rating=63mW, Pricing 1="1=0.1, 10=0.016, 100=0.0064, 1000=0.0029, 2500=0.0025, 5000=0.0021 (USD)", REACH SVHC=Unknown, Stock 1=19803, Supplier 1=Digi-Key, Termination=SMD/SMT, Voltage Rating (DC)=50V, Width=0.02inch, Working Voltage=50V
R64: "68.1 kOhms ±1% 0.063W, 1/16W Chip Resistor 0402 (1005 Metric) Moisture Resistant Thick Film", Case/Package=0402, Case Code (Metric)=1005, Manufacturer=Yageo, Manufacturer Part Number=RC0402FR-0768K1L, Max Operating Temperature=155°C, Max Power Dissipation=63mW, Min Operating Temperature=-55°C, Power Rating=62.5mW, Resistance=68.1kR, Supplier Part Number 1=YAG3213CT-ND, Temperature Coefficient=100ppm/°C, Tolerance=1%, Voltage Rating=50V, Case Code (Imperial)=0402, ComponentLink1Description=http://www.mouser.com/ds/2/447/PYu-RC0402_51_RoHS_L_6_r-8721.pdf?src-supplier=Mouser, ComponentLink1URL=http://www.mouser.com/ds/2/447/PYu-RC0402_51_RoHS_L_6_r-8721.pdf?src-supplier=Mouser, ComponentLink2Description=http://www.yageo.com/documents/recent/PYu-RC0402_51_RoHS_L_6_r.pdf?src-supplier=Future+Electronics, ComponentLink2URL=http://www.yageo.com/documents/recent/PYu-RC0402_51_RoHS_L_6_r.pdf?src-supplier=Future+Electronics, ComponentLink3Description=https://www.verical.com/server-webapp/html/getDatasheet?partID=325048&src-supplier=Verical, ComponentLink3URL=https://www.verical.com/server-webapp/html/getDatasheet?partID=325048&src-supplier=Verical, Composition="Thick Film", Depth=0.5mm, Features="Moisture Resistant", Height=0.016inch, Lead Free="Lead Free", Length=1mm, Military Standard=Not, Mount="Surface Mount", Number of Terminations=2, Packaging="Tape and Reel", Pricing 1="1=0.1, 10=0.016, 100=0.0064, 1000=0.0029, 2500=0.0025, 5000=0.0021 (USD)", Stock 1=140424, Supplier 1=Digi-Key, Termination=SMD/SMT, Voltage Rating (DC)=50V, Weight=2.3E-05oz, Width=0.02inch, Working Voltage=50V
R65 R66: "18.2 kOhms ±1% 0.063W, 1/16W Chip Resistor 0402 (1005 Metric) Moisture Resistant Thick Film", Case/Package=0402, Case Code (Metric)=1005, Manufacturer=Yageo, Manufacturer Part Number=RC0402FR-0718K2L, Max Operating Temperature=155°C, Max Power Dissipation=63mW, Min Operating Temperature=-55°C, Package Quantity=10000, Power Rating=62.5mW, Resistance=18.2kR, Supplier Part Number 1=YAG2371CT-ND, Temperature Coefficient=100ppm/°C, Tolerance=1%, Voltage Rating=50V, Case Code (Imperial)=0402, ComponentLink1Description=http://www.yageo.com/documents/recent/PYu-RC0402_51_RoHS_L_6_r.pdf?src-supplier=Future+Electronics, ComponentLink1URL=http://www.yageo.com/documents/recent/PYu-RC0402_51_RoHS_L_6_r.pdf?src-supplier=Future+Electronics, ComponentLink2Description=http://www.yageo.com.tw/exep/pages/download/literatures/PYu-R_INT-thick_7.pdf?src-supplier=Digi-Key, ComponentLink2URL=http://www.yageo.com.tw/exep/pages/download/literatures/PYu-R_INT-thick_7.pdf?src-supplier=Digi-Key, ComponentLink3Description=http://www.mouser.com/ds/2/447/PYu-RC0402_51_RoHS_L_6_r-8721.pdf?src-supplier=Mouser, ComponentLink3URL=http://www.mouser.com/ds/2/447/PYu-RC0402_51_RoHS_L_6_r-8721.pdf?src-supplier=Mouser, ComponentLink4Description=http://www.yageo.com/documents/recent/PYu-RC0402_51_RoHS_L_6.pdf?src-supplier=Avnet+Europe, ComponentLink4URL=http://www.yageo.com/documents/recent/PYu-RC0402_51_RoHS_L_6.pdf?src-supplier=Avnet+Europe, Composition="Thick Film", Contact Plating=Tin,Lead,Matte, Depth=0.5mm, Features="Moisture Resistant", Height=0.016inch, Lead Free="Lead Free", Length=1mm, Military Standard=Not, Mount="Surface Mount", Number of Terminations=2, Packaging="Tape and Reel", Pricing 1="1=0.1, 10=0.015, 100=0.0062, 1000=0.0028, 2500=0.0024, 5000=0.002 (USD)", Radiation Hardening=No, Stock 1=372233, Supplier 1=Digi-Key, Termination=SMD/SMT, Voltage Rating (DC)=50V, Width=0.02inch, Working Voltage=50V
R67: "360 kOhms ±1% 0.063W, 1/16W Chip Resistor 0402 (1005 Metric) Moisture Resistant Thick Film", Case/Package=0402, Case Code (Metric)=1005, Manufacturer=Yageo, Manufacturer Part Number=RC0402FR-07360KL, Max Operating Temperature=155°C, Max Power Dissipation=63mW, Min Operating Temperature=-55°C, Package Quantity=1, Power Rating=62.5mW, Resistance=360kR, Supplier Part Number 1=311-360KLRCT-ND, Temperature Coefficient=100ppm/°C, Tolerance=1%, Voltage Rating=50V, Case Code (Imperial)=0402, ComponentLink1Description=http://www.yageo.com/documents/recent/PYu-RC_Group_51_RoHS_L_10.pdf?src-supplier=Digi-Key, ComponentLink1URL=http://www.yageo.com/documents/recent/PYu-RC_Group_51_RoHS_L_10.pdf?src-supplier=Digi-Key, ComponentLink2Description=http://www.yageo.com/documents/recent/PYu-RC0402_51_RoHS_L_6_r.pdf?src-supplier=Future+Electronics, ComponentLink2URL=http://www.yageo.com/documents/recent/PYu-RC0402_51_RoHS_L_6_r.pdf?src-supplier=Future+Electronics, ComponentLink3Description=http://www.yageo.com/documents/recent/PYu-RC0402_51_RoHS_L_6.pdf?src-supplier=Avnet, ComponentLink3URL=http://www.yageo.com/documents/recent/PYu-RC0402_51_RoHS_L_6.pdf?src-supplier=Avnet, ComponentLink4Description=http://www.mouser.com/ds/2/447/PYu-RC0402_51_RoHS_L_6_r-8721.pdf?src-supplier=Mouser, ComponentLink4URL=http://www.mouser.com/ds/2/447/PYu-RC0402_51_RoHS_L_6_r-8721.pdf?src-supplier=Mouser, Composition="Thick Film", Contact Plating=Tin,Matte, Depth=0.5mm, Features="Moisture Resistant", Height=0.016inch, Lead Free="Lead Free", Length=1mm, Military Standard=Not, Mount="Surface Mount", Number of Terminations=2, Packaging="Tape and Reel", Pricing 1="1=0.1, 10=0.016, 100=0.0064, 1000=0.0029, 2500=0.0025, 5000=0.0021 (USD)", REACH SVHC=Unknown, Stock 1=472644, Supplier 1=Digi-Key, Termination=SMD/SMT, Voltage Rating (DC)=50V, Width=0.02inch
R70 R129: "47 kOhms ±1% 0.063W, 1/16W Chip Resistor 0402 (1005 Metric) Moisture Resistant Thick Film", Case/Package=0402, Case Code (Metric)=1005, Manufacturer=Yageo, Manufacturer Part Number=RC0402FR-0747KL, Max Operating Temperature=155°C, Max Power Dissipation=63mW, Min Operating Temperature=-55°C, Package Quantity=1, Power Rating=62.5mW, Resistance=47kR, Supplier Part Number 1=311-47.0KLRCT-ND, Temperature Coefficient=100ppm/°C, Tolerance=1%, Voltage Rating=50V, Case Code (Imperial)=0402, ComponentLink1Description=http://www.yageo.com/documents/recent/PYu-RC0402_51_RoHS_L_6_r.pdf?src-supplier=Future+Electronics, ComponentLink1URL=http://www.yageo.com/documents/recent/PYu-RC0402_51_RoHS_L_6_r.pdf?src-supplier=Future+Electronics, ComponentLink2Description=http://www.farnell.com/datasheets/1018594.pdf?src-supplier=Element14, ComponentLink2URL=http://www.farnell.com/datasheets/1018594.pdf?src-supplier=Element14, ComponentLink3Description=https://www.verical.com/server-webapp/html/getDatasheet?partID=323748&src-supplier=Verical, ComponentLink3URL=https://www.verical.com/server-webapp/html/getDatasheet?partID=323748&src-supplier=Verical, ComponentLink4Description=http://www.yageo.com/documents/recent/PYu-RC_Group_51_RoHS_L_10.pdf?src-supplier=Digi-Key, ComponentLink4URL=http://www.yageo.com/documents/recent/PYu-RC_Group_51_RoHS_L_10.pdf?src-supplier=Digi-Key, Composition="Thick Film", Depth=0.5mm, Features="Moisture Resistant", Height=0.016inch, Lead Free="Lead Free", Length=1mm, Military Standard=Not, Mount="Surface Mount", Number of Terminations=2, Packaging="Tape and Reel", Pricing 1="1=0.1, 10=0.015, 100=0.0062, 1000=0.0028, 2500=0.0024, 5000=0.002 (USD)", REACH SVHC=Unknown, Stock 1=0, Supplier 1=Digi-Key, Termination=SMD/SMT, Width=0.5mm
R75 R76: "2.2 Ohms ±5% 1W Chip Resistor 2512 (6432 Metric) Automotive AEC-Q200 Thick Film", Case/Package=2512, Case Code (Metric)=6432, Manufacturer="Vishay Dale", Manufacturer Part Number=CRCW25122R20JNEG, Max Operating Temperature=155°C, Max Power Dissipation=1W, Min Operating Temperature=-55°C, Package Quantity=2000, Resistance=2.2R, Supplier Part Number 1=541-2.2XCT-ND, Temperature Coefficient=200ppm/°C, Tolerance=5%, Voltage Rating=500V, Case Code (Imperial)=2512, ComponentLink1Description=http://www.vishay.com/docs/20035/dcrcwe3.pdf?src-supplier=Digi-Key, ComponentLink1URL=http://www.vishay.com/docs/20035/dcrcwe3.pdf?src-supplier=Digi-Key, Composition="Thick Film", Contact Plating=Tin, Depth=3.15mm, Features="Automotive AEC-Q200", Height=0.6mm, Lead Free="Lead Free", Length=6.3mm, Military Standard=Not, Mount="Surface Mount", Number of Pins=2, Number of Terminals=2, Number of Terminations=2, Packaging="Tape and Reel", Power Rating=1W, Pricing 1="1=0.34, 10=0.292, 100=0.114, 1000=0.0477 (USD)", Radiation Hardening=No, REACH SVHC=Unknown, Stock 1=19521, Supplier 1=Digi-Key, Termination=SMD/SMT, Voltage Rating (DC)=500V, Weight=0.001429oz, Width=3.15mm